# Altium PCB BOOSTXL-K350QVG-S1.PcbDoc (part 1 of 4)
Units mm, origin at the board's own origin, x right, y up, seen from the top; angles counter-clockwise.
Board outline 152.4 x 101.6 mm, 2 copper layers (Top Layer, Bottom Layer); 36 components, 58 nets, 6671 pads, 44 vias.
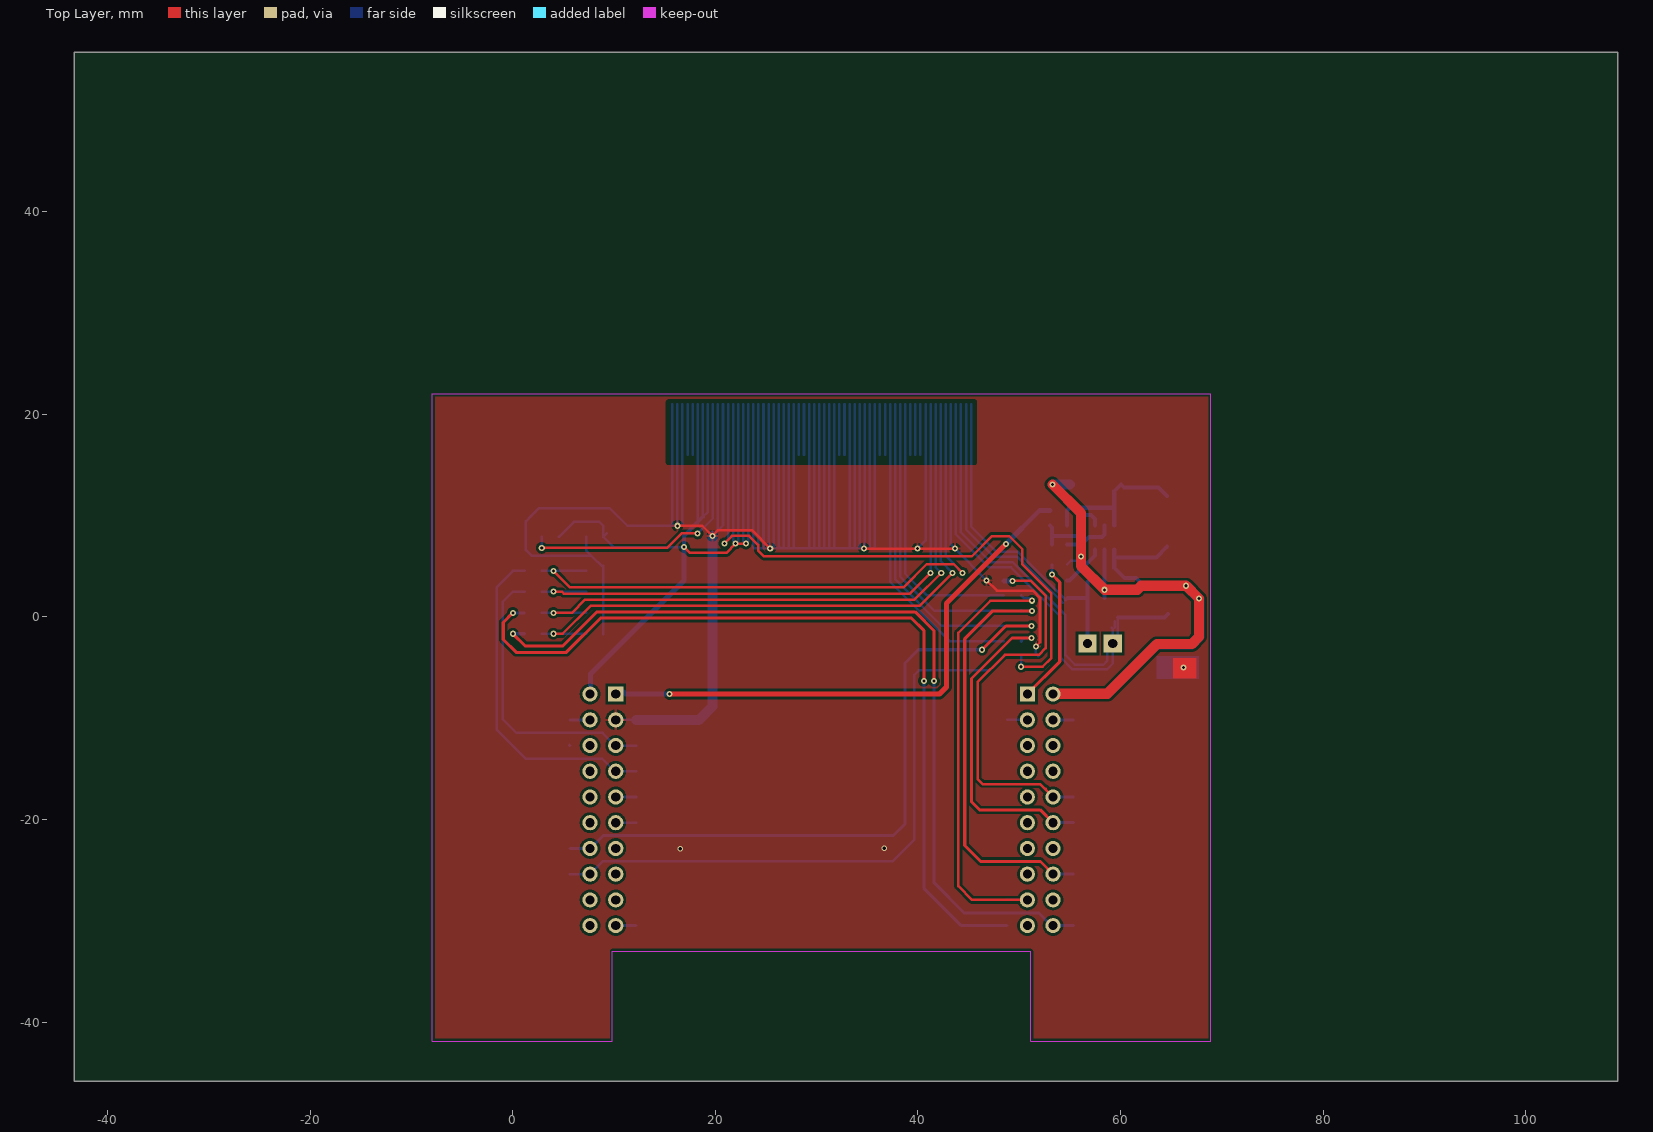
[diagram p0: Top Layer view]
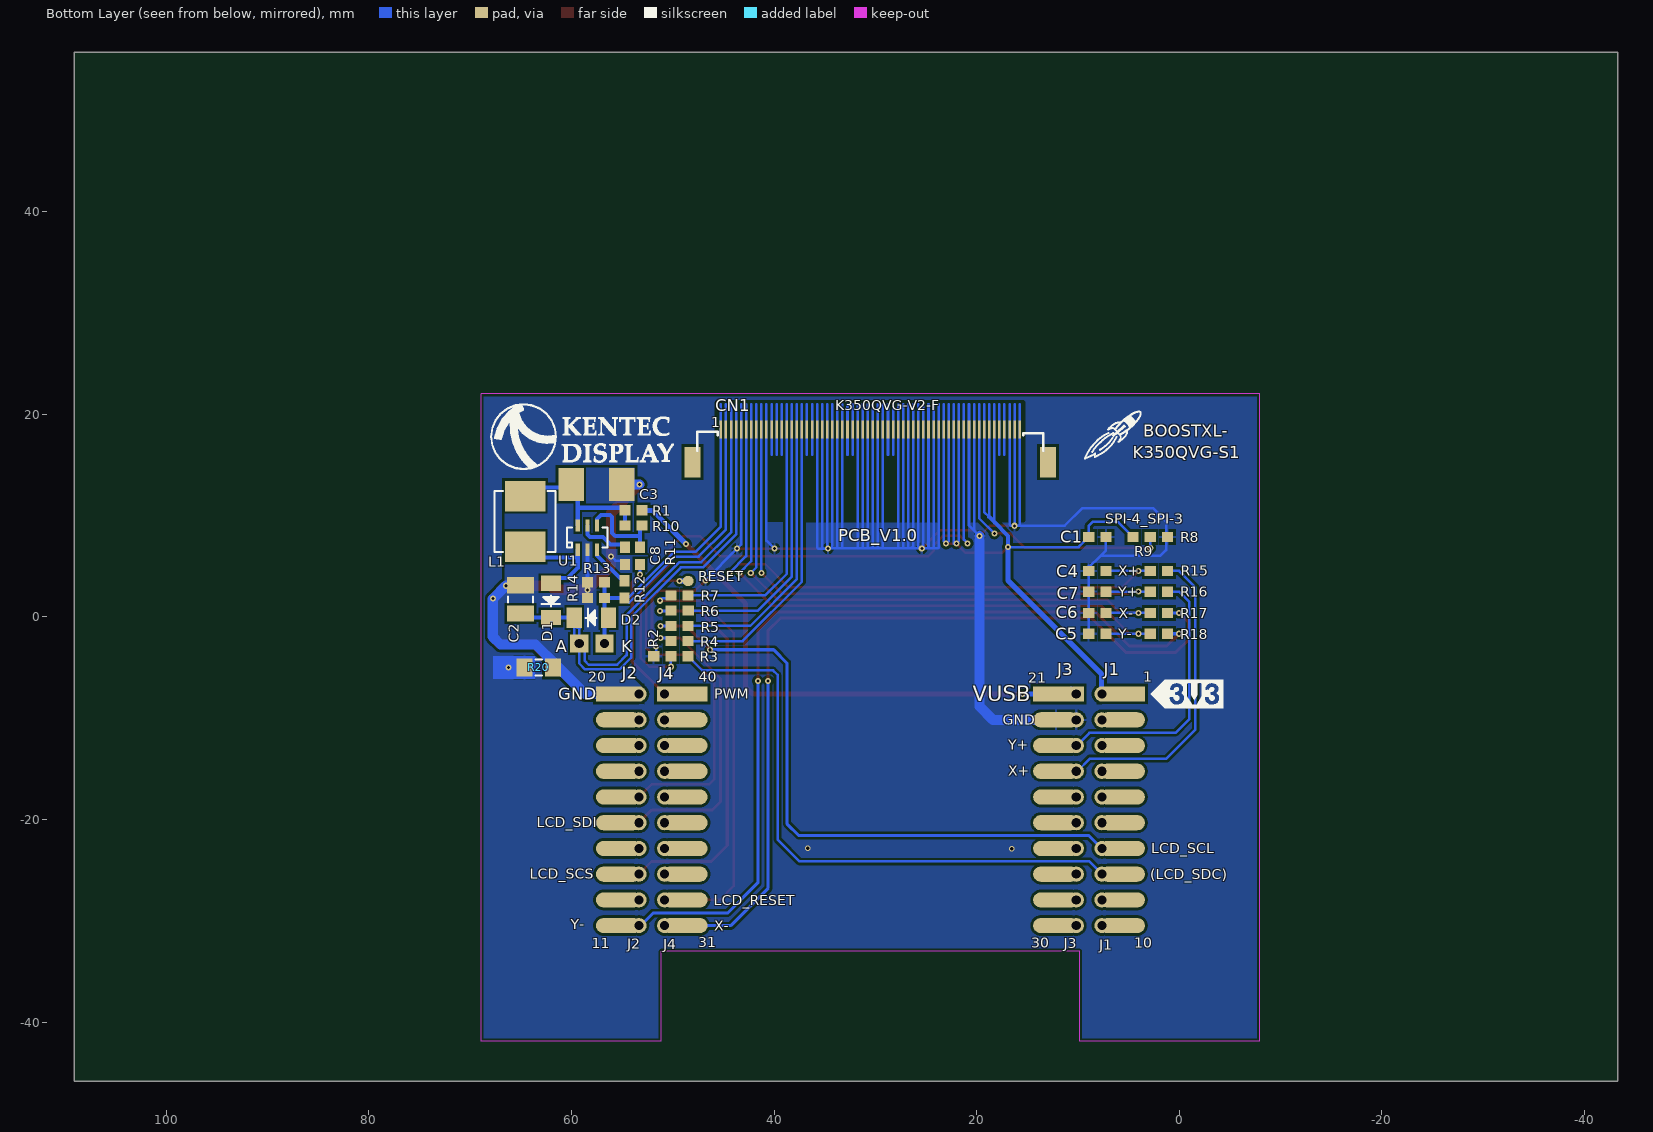
[diagram p1: Bottom Layer view, seen from below]

## Layer stack, top to bottom
Top Solder: solder mask 0.0102, Solder Resist, Dk 3.5
Top Layer: signal copper 0.0356
Dielectric1: dielectric 0.32, FR-4, Dk 4.8
Bottom Layer: signal copper 0.0356
Bottom Solder: solder mask 0.0102, Solder Resist, Dk 3.5

## Board outline
-43.307,-45.847 109.093,-45.847 109.093,55.753 -43.307,55.753

## Design rules (kind name [scope] priority, off if disabled: settings)
Clearance Clearance_1 [All] p1: gap=0.254
Clearance Pol [All vs (IsRegion)] p2: gap=0.25
ComponentClearance [All] p1 off: gap=0.254 collisioncheckmode=3 verticalgap=0.254 showdistances=FALSE
FabricationTestPointUsage TestPointUsage [All] p1: valid=0 allowmultiple=FALSE
FabricationTestpoint Testpoint [All] p1: side=3 testpointundercomponent=TRUE minsize=1.016 maxsize=2.54 preferedsize=1.524 minholesize=0 maxholesize=1.016 preferedholesize=0.813 testpointgrid=0.025 allowsidetop=TRUE allowsidebottom=TRUE usegrid=TRUE gridtolerance=0
Height [All] p1 off: minheight=0 maxheight=25.4 prefheight=12.7
HoleSize [All] p1: absolutevalues=TRUE maxlimit=6 minlimit=0.3 maxpercent=80.000 minpercent=20.000
MinimumSolderMaskSliver [All] p1 off: minsoldermaskwidth=0.254
PolygonConnect [All] p1: connectstyle=Relief reliefconductorwidth=0.254 reliefentries=4 polygonreliefangle="90 Angle" airgapwidth=0.254
RoomDefinition EB-L35SPI_01 [InComponentClass('EB-L35SPI_01')] p1: confinementstyle=ConfineOut formatcopy=TRUE lockcomponents=FALSE outline 88.15,-41.77 100.25,-41.77 100.25,-9.47 88.15,-9.47
RoutingVias [All] p1: holewidth=0.3 width=0.6 viastyle="Through Hole" minholewidth=0.3 minwidth=0.6 maxholewidth=0.3 maxwidth=0.6
SilkToSolderMaskClearance SilkscreenOverComponentPads [IsPad] p1 off: minsilkscreentomaskgap=0.254 clearancetoexposedcopper=TRUE
SolderMaskExpansion SolderMaskExpansion_1 [(IsPad)] p1: expansion=0.102
SolderMaskExpansion [(IsVia)] p2: expansion=-10
Width [All] p1: maxlimit=1 minlimit=0.25 preferedwidth=0.25 minimp=50.000000 maximp=50.000000 favimp=50.000000
22 further rules are at their usual default settings.

## Components (designator, comment, footprint, x,y, rotation, side; value= is the part's Value field where it differs from the comment)
C1 "Cap Semi" 1608[0603]#1 8.08,7.9 r0 bottom
C2 "1.0uF" 3225[1210] 65.03,1.73 r270 bottom
C3 "4.7uF" TAN-C 60.03,13.08 r180 bottom
C4 "Cap Semi" 1608[0603]#2 8.08,4.54 r180 top
C5 "Cap Semi" 1608[0603]#2 8.08,-1.66 r180 top
C6 "Cap Semi" 1608[0603]#2 8.07,0.4 r180 top
C7 "Cap Semi" 1608[0603]#2 8.08,2.49 r180 top
C8 "Cap Semi" 1608[0603]#1 54.73,6.03 r90 bottom
CN1 "K350QVG-V2-F" CON-K350-60 45.23,18.408 r0 bottom (schematic designator CN2)
D1 "4001" DIODE 62.018,3.335 r270 bottom
D2 "4001" DIODE 56.325,-0.087 r0 bottom
J1 "Socket 10" HDR1X10#1 7.62,-7.62 r270 bottom
J2 "Socket 10" HDR1X10#2 53.34,-7.62 r270 bottom
J3 "Socket 10" HDR1X10#2 10.16,-7.62 r270 bottom
J4 "Socket 10" HDR1X10#1 50.8,-7.62 r270 bottom
L1 "10uH" IND 64.569,11.933 r270 bottom
R1 "Res Semi" 1608[0603]#1 53.88,10.53 r180 bottom
R2 "Res Semi" 1608[0603]#1 51.03,-3.88 r180 bottom
R3 "Res Semi" 1608[0603]#1 49.33,-3.88 r0 bottom
R4 "Res Semi" 1608[0603]#1 49.33,-2.38 r180 bottom
R5 "Res Semi" 1608[0603]#1 49.33,-0.88 r180 bottom
R6 "Res Semi" 1608[0603]#1 49.32,0.62 r180 bottom
R7 "Res Semi" 1608[0603]#1 49.33,2.12 r180 bottom
R8 "Res Semi" 1608[0603]#1 2,7.9 r180 bottom
R9 "Res Semi" 1608[0603]#1 3.7,7.9 r0 bottom
R10 "NC" 1608[0603]#1 53.88,9.03 r180 bottom
R11 "0R" 1608[0603]#1 53.23,6.03 r90 bottom
R12 "1K" 1608[0603]#2 54.75,2.72 r90 top
R13 "NC" 1608[0603]#1 57.58,3.43 r0 bottom
R14 "68R(for 20mA)" 1608[0603]#1 57.58,1.88 r0 bottom
R15 "0" 1608[0603]#1 2,4.54 r0 bottom
R16 "0" 1608[0603]#2 2,2.49 r0 top
R17 "0" 1608[0603]#1 2,0.4 r180 bottom
R18 "0" 1608[0603]#1 2,-1.66 r0 bottom
R20 "R20" 3216[1206] 63.23,-4.99 r180 bottom
U1 "AIC1896" SOT-23-6 58.43,7.83 r180 bottom

## Footprints (in the part's own frame and the unit in brackets; to place one, negate y for a bottom-side part, rotate by r counter-clockwise, add the part's x,y. Pads: shape width x height; smd on the part's side, far side on the other; paste and mask are expansions set on the pad)
1608[0603]#1 [mm] "Chip Capacitor; Body 1.6 x 0.8 mm (LxW typ)"
  rect 1.1x1 smd: 1(-0.85,0) 2(0.85,0)
1608[0603]#2 [mm] "Chip Capacitor; Body 1.6 x 0.8 mm (LxW typ)"
  rect 1.1x1 smd far side: 1(-0.85,0) 2(0.85,0)
3216[1206] [mm] "Chip Resistor; Body 3.2 x 1.6 mm (LxW typ)"
  rect 1.6x1.8 smd: 1(-1.4,0) 2(1.4,0)
  silkscreen extent -0.3,-0.8 0.3,0.8
3225[1210] [mm] "Chip Resistor; Body 3.2 x 2.5 mm (LxW typ)"
  rect 1.6x2.7 smd: 1(-1.4,0) 2(1.4,0)
  silkscreen extent -0.3,-1.25 0.3,1.25
CON-K350-60 [mm]
  rect 0.25x1.8 smd: 1(0.016,-0.1) 2(-0.484,-0.1) 3(-0.984,-0.1) 4(-1.484,-0.1) 5(-1.984,-0.1) 6(-2.484,-0.1) 7(-2.984,-0.1) 8(-3.484,-0.1) 9(-3.984,-0.1) 10(-4.484,-0.1) 11(-4.984,-0.1) 12(-5.484,-0.1) 13(-5.984,-0.1) 14(-6.484,-0.1) 15(-6.984,-0.1) 16(-7.484,-0.1) 17(-7.984,-0.1) 18(-8.484,-0.1) 19(-8.984,-0.1) 20(-9.484,-0.1) 21(-9.984,-0.1) 22(-10.484,-0.1) 23(-10.984,-0.1) 24(-11.484,-0.1) 25(-11.984,-0.1) 26(-12.484,-0.1) 27(-12.984,-0.1) 28(-13.484,-0.1) 29(-13.984,-0.1) 30(-14.484,-0.1) 31(-14.984,-0.1) 32(-15.484,-0.1) 33(-15.984,-0.1) 34(-16.484,-0.1) 35(-16.984,-0.1) 36(-17.484,-0.1) 37(-17.984,-0.1) 38(-18.484,-0.1) 39(-18.984,-0.1) 40(-19.484,-0.1) 41(-19.984,-0.1) 42(-20.484,-0.1) 43(-20.984,-0.1) 44(-21.484,-0.1) 45(-21.984,-0.1) 46(-22.484,-0.1) 47(-22.984,-0.1) 48(-23.484,-0.1) 49(-23.984,-0.1) 50(-24.484,-0.1) 51(-24.984,-0.1) 52(-25.484,-0.1) 53(-25.984,-0.1) 54(-26.484,-0.1) 55(-26.984,-0.1) 56(-27.484,-0.1) 57(-27.984,-0.1) 58(-28.484,-0.1) 59(-28.984,-0.1) 60(-29.484,-0.1)
  rect 1.6x3 smd: ""(-32.284,3.126) ""(2.816,3.126)
  silkscreen extent -31.81,0.13 2.35,1.98
DIODE [mm]
  rect 1.5x2 smd: A(0.005,-0.012) K(3.405,-0.012)
  silkscreen extent 1.2,-0.94 2.3,0.86
HDR1X10#1 [mm] "Connector; Header; 10 Position"
  rect 1.5x4.5 smd: 1(0,2)
  oval 1.5x4.5 smd: 2(2.54,2) 3(5.08,2) 4(7.62,2) 5(10.16,2) 6(12.7,2) 7(15.24,2) 8(17.78,2) 9(20.32,2) 10(22.86,2)
HDR1X10#2 [mm] "Connector; Header; 10 Position"
  rect 1.5x4.5 smd: 1(0,-2)
  oval 1.5x4.5 smd: 2(2.54,-2) 3(5.08,-2) 4(7.62,-2) 5(10.16,-2) 6(12.7,-2) 7(15.24,-2) 8(17.78,-2) 9(20.32,-2) 10(22.86,-2)
IND [mm]
  rect 3x4 smd: 1(0.003,-0.011) 2(5.003,-0.011)
  silkscreen extent -0.5,-3.01 5.5,2.99
SOT-23-6 [mm]
  rect 0.4x1.2 smd: 1(-0.953,-1.195) 2(-0.003,-1.195) 3(0.947,-1.195) 4(0.947,1.205) 5(-0.003,1.205) 6(-0.953,1.205)
  silkscreen extent -2,-0.99 2,1.01
TAN-C [mm]
  rect 2.5x3.3 smd: 1(0,-0.006) 2(5,-0.006)

## Part data
C1 C4 C5 C6 C7 C8: "Capacitor (Semiconductor SIM Model)"
C2 C3: library part CAP, "Capacitor"
CN1: library part K350QVG
D1 D2: library part DIODE, "Diode"
J1 J2 J3 J4: library part "Header 10", "Header, 10-Pin"
L1: library part INDUCTOR
R1 R2 R3 R4 R5 R6 R7 R8 R9: "Semiconductor Resistor"
R10 R11 R12 R13 R14: library part RES1
R15 R16 R17 R18: library part "Res Semi", "Semiconductor Resistor"

## Free pads (board coordinates)
  oval 1.1x1 smd far side: 0(48.48,3.55)
  rect 1.5x1.5 hole 0.9: 1(10.16,-7.62) 1(50.8,-7.62)